# EAGLE board OPNpool r3 (EAGLE 9.6.2)
AUTHOR_NAME: Johan Vonk; REV: 0.1
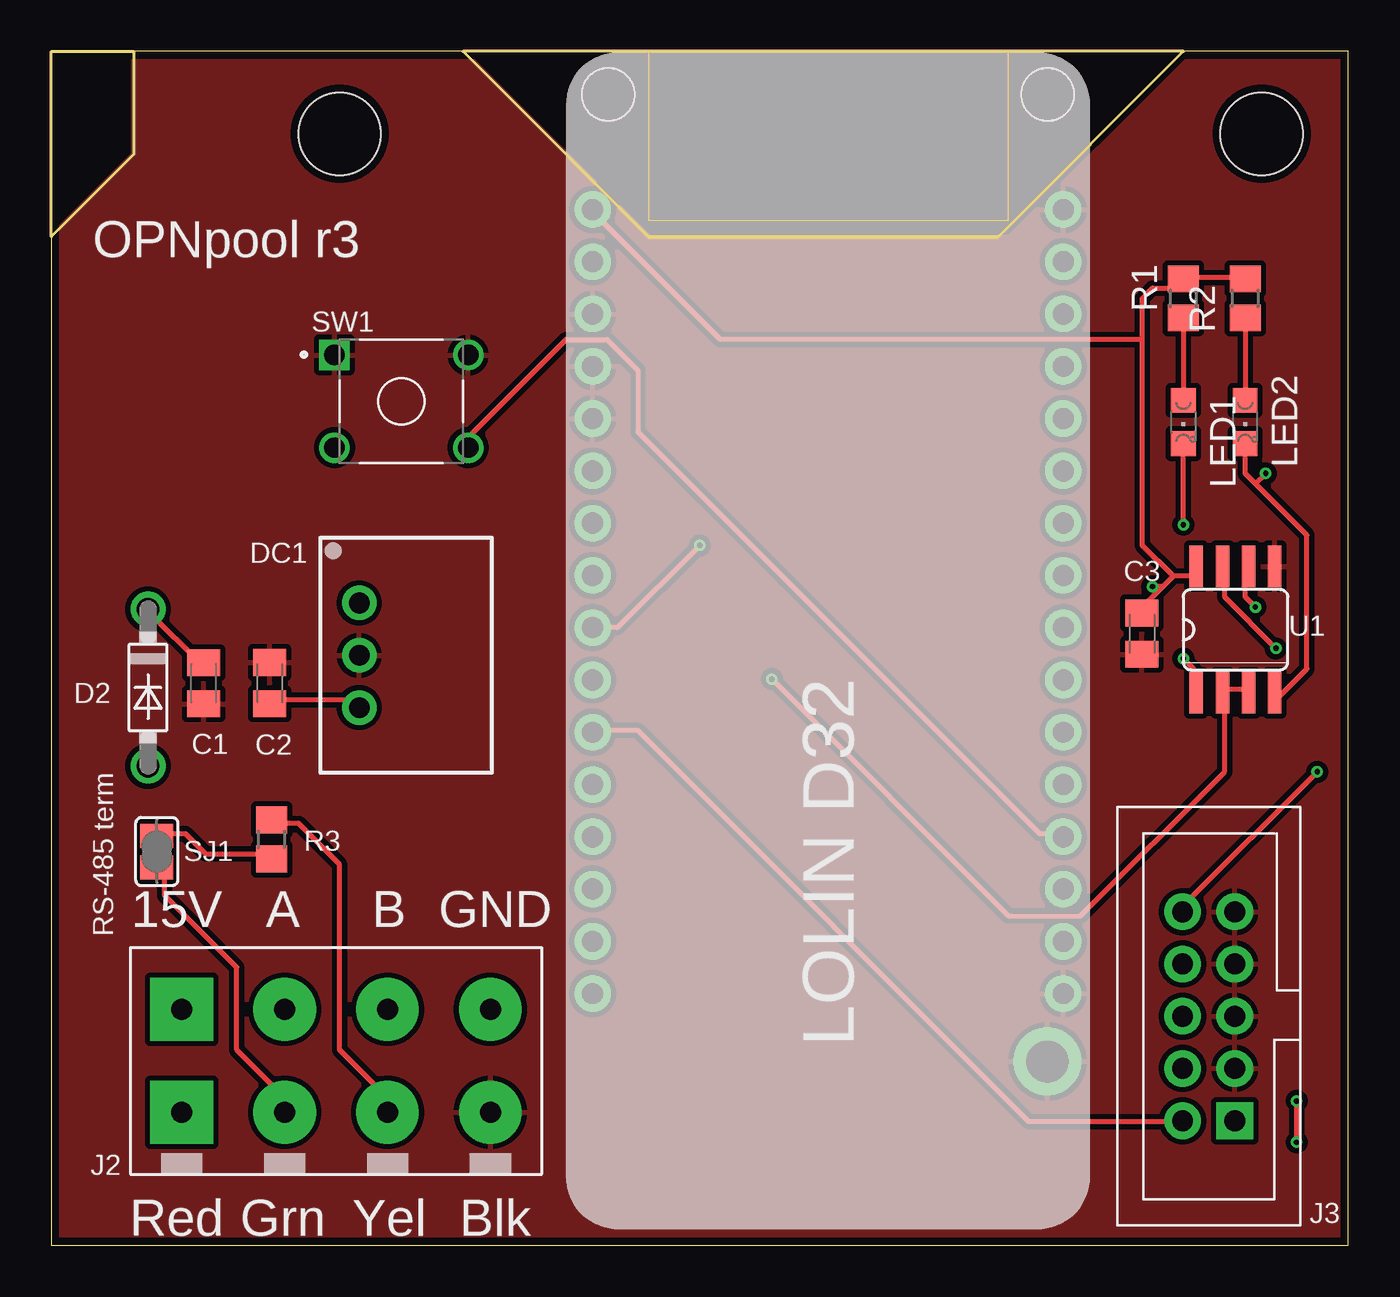
[diagram p0: board, top side]
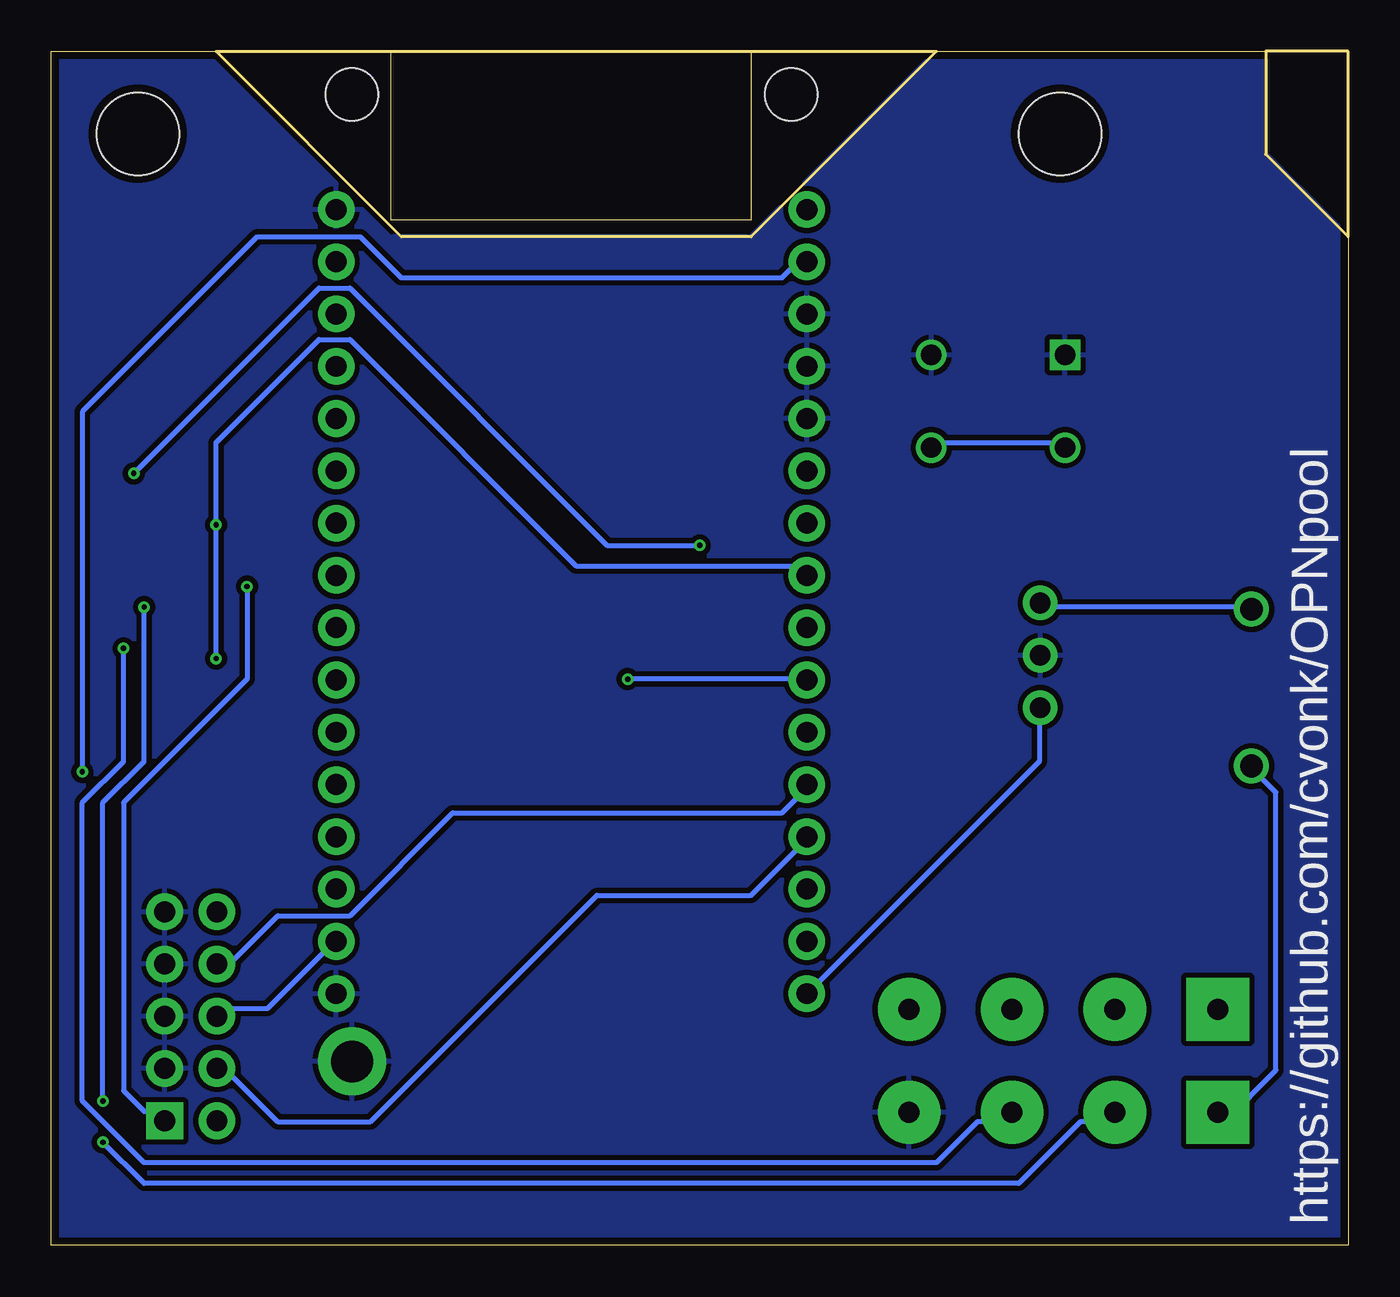
[diagram p1: board, bottom side, seen from below]

Size 63 x 58 mm. Coordinates in mm from the lower left corner, seen from the top.
Outline: 0,58 0,0 63,0 63,58 0,58
Copper layers (1*16): Top 0.035559375mm / dielectric 1.6mm / Bottom 0.035559375mm
Design rules "oshpark-2layer-auto-routing": minimum track width 10mil, minimum drill 10mil, track to track 10mil, track to pad 8mil, pad to pad 8mil, via to via 8mil, smd to smd 6mil, copper to edge 15mil, drill to drill 6mil, minimum pad ring 6mil, minimum via ring 6mil, stop-mask expansion 2.5mil, vias tented up to drill 0mil, thermal gap 10mil
Holes 4 mm at 14,54 58.8,54
tRestrict: area 29,50 to 47,58
bRestrict: area 29,50 to 47,58
Milling: area 29,49.8 to 46.5,58; 8 lines

## Footprints (pad centres in the part's own frame; a part is rotated, then mirrored left to right if it is on the bottom)
C0805K = smd 1.3 x 1.6: 1 -1,0; 2 1,0
DO41-7.6 = drill 1.1 pad 1.7: A 3.81,0; C -3.81,0
SIP3 = drill 1 pad 1.676: 1 -2.54,-2.54; 2 0,-2.54; 3 2.54,-2.54
SPTAF1/4-5,0-LL = drill 1.016 pad 3.048 square: 1 -7.713,-2.54; 1@1 -7.713,2.46 | drill 1.016 pad 3.048: 2 -2.713,-2.54; 2@1 -2.713,2.46; 3 2.287,-2.54; 3@1 2.287,2.46; 4 7.287,-2.54; 4@1 7.287,2.46
2X05_SHROUDED = drill 1.016 pad 1.778 square: 1 -5.08,-1.27 | drill 1.016 pad 1.778: 2 -5.08,1.27; 3 -2.54,-1.27; 4 -2.54,1.27; 5 0,-1.27; 6 0,1.27; 7 2.54,-1.27; 8 2.54,1.27; 9 5.08,-1.27; 10 5.08,1.27
CHIPLED_0805 = smd 1.2 x 1.2: A 0,-1.05; C 0,1.05
LOLIN-D32 = drill 1.016 pad 1.778: 0 -10.16,-10.16; 2 -12.7,-10.16; 3V3 20.32,12.7; 4 -7.62,-10.16; 5 0,-10.16; 12 -7.62,12.7; 13 -10.16,12.7; 14 -5.08,12.7; 15 -15.24,-10.16; 16 -5.08,-10.16; 17 -2.54,-10.16; 18 2.54,-10.16; 19 5.08,-10.16; 21 7.62,-10.16; 22 15.24,-10.16; 23 17.78,-10.16; 25 2.54,12.7; 26 0,12.7; 27 -2.54,12.7; 32 7.62,12.7; 33 5.08,12.7; 34 10.16,12.7; BAT -17.78,12.7; EN -12.7,12.7; GND -17.78,-10.16; GND@1 20.32,-10.16; RS 17.78,12.7; RX 10.16,-10.16; TX 12.7,-10.16; USB_5V -15.24,12.7; VN 12.7,12.7; VP 15.24,12.7 | drill 2.032 pad 3.302: GND@2 -21.082,-9.398 | hole 2.54: 25.908,11.938; 25.908,-9.398
R0805 = smd 1.3 x 1.5: 1 -0.95,0; 2 0.95,0
SJ = smd 1.168 x 1.6: 1 -0.762,0; 2 0.762,0
TE_1-1825910-4 = drill 0.99 square: 1 -3.25,2.25 | drill 0.99: 2 3.25,2.25; 3 -3.25,-2.25; 4 3.25,-2.25
SO08 = smd 0.66 x 2.032: 1 -1.905,-3.073; 2 -0.635,-3.073; 3 0.635,-3.073; 4 1.905,-3.073; 5 1.905,3.073; 6 0.635,3.073; 7 -0.635,3.073; 8 -1.905,3.073

## Placement (x,y rotation side)
C1  10uF mlcc 25V  [C0805K]  7.39,27.3 270 top
C2  10uF mlcc  [C0805K]  10.61,27.31 90 top
C3  0.1uF cer.  [C0805K]  52.99,29.71 270 top
D2  1N5818  [DO41-7.6]  4.69,27.09 270 top
DC1  R-78E5.0-0.5  [SIP3]  17.5,28.66 270 top
J2  RS485-TERM-SPTAF  [SPTAF1/4-5,0-LL]  14.04,8.99 0 top
J3  ESP-JTAG-2X05  [2X05_SHROUDED]  56.23,11.12 90 top
LED1  RX  [CHIPLED_0805]  55,40 180 top
LED2  TX  [CHIPLED_0805]  58,40 180 top
PCB1  LOLIN-D32  [LOLIN-D32]  39,30 90 top
R1  68Ω  [R0805]  55,46 90 top
R2  68Ω  [R0805]  58,46 90 top
R3  120Ω  [R0805]  10.69,19.71 270 top
SJ1  OPEN  [SJ]  5.12,19.12 270 top
SW1  Factory (5 sec)  [TE_1-1825910-4]  17,41 0 top
U1  MAX3485CSA+  [SO08]  57.53,29.91 0 top

## Library data of the parts
C1 C2 = rcl; MANF: Murata Electronics; MANF#: GJ821BR61E106KE11L; MOUSER#: 81-GJ821BR61E106KE1L; SPICEPREFIX: C
C3 = rcl; MANF: KEMET; MANF#: C0805C104K1RECAUTO; MOUSER#: 80-C0805C104K1REAUTO; SPICEPREFIX: C
D2 = Coert Vonk; MANF: Rectron; MANF#: 1N5818-T; MOUSER#: 583-1N5818-T
DC1 = Coert Vonk; MANF: RECOM Power; MANF#: R-78E5.0-0.5; MOUSER#: 919-R-78E5.0-0.5
J2 = Coert Vonk; MANF: Phoenix Contact; MANF#: 1864451; MOUSER#: 651-1864451
J3 = Coert Vonk; DIGIKEY#: WM3478-ND; MANF: Molex; MANF#: 70246-1004; MOUSER#: 538-70246-1004
LED1 LED2 = OPNpool
PCB1 = Coert-Vonk
R1-R3 = rcl; MANF: Bourns; MANF#: CRM0805-JW-1R5ELF; MOUSER#: 652-CRM0805JW1R5ELF; SPICEPREFIX: R
SJ1 = jumper
SW1 = 1-1825910-4; COMMENT: 1-1825910-4; DESCRIPTION: Switch Tactile OFF (ON) SPST Round Button PC Pins 0.05A 24VDC 100000Cycles 1.56N Thru-Hole; DIGI-KEY_PART_NUMBER: 450-1653-ND; MF: TE Connectivity; MP: 1-1825910-4; PACKAGE: None; PURCHASE-URL: https://pricing.snapeda.com/search/part/1-1825910-4/?ref=eda
U1 = Coert Vonk; MANF: Maxim Integrated; MANF#: MAX3485CSA+; MF: MAXIM; MOUSER#: 700-MAX3485CSA; MPN: MAX481CSA; OC_FARNELL: unknown; OC_NEWARK: 90C3817

## Nets
3V3: C3.1 J3.1 PCB1.3V3 R1.2 R2.2 U1.8
15V: D2.A J2.1
A: J2.2 SJ1.2 U1.6
B: J2.3 R3.1 U1.7
GND: C1.2 C2.2 C3.2 DC1.2 J2.4 J3.3 J3.5 J3.7 J3.9 PCB1.34 PCB1.GND PCB1.GND@1 PCB1.GND@2 PCB1.VN PCB1.VP SW1.1 SW1.2 U1.5
JTAG_!RST: J3.10 PCB1.RS
JTAG_CK: J3.4 PCB1.13
JTAG_DI: J3.8 PCB1.12
JTAG_DO: J3.6 PCB1.15
JTAG_MS: J3.2 PCB1.14
N$1: LED1.A R1.1
N$2: LED2.A R2.1
N$3: PCB1.0 SW1.3 SW1.4
N$5: R3.2 SJ1.1
RTS: PCB1.27 U1.2 U1.3
RX2: LED1.C PCB1.25 U1.1
TX: LED2.C PCB1.26 U1.4
VIN: C1.1 D2.C DC1.1
VOUT: C2.1 DC1.3 PCB1.BAT

## Tracks (layer width: path | path; a pad name or v marks a point on that pad's centre or on a via)
3V3  (via drill 0.25)
  Top 0.254: R2.2 58,47 55,47 R1.2 55,46.5 53.5,46.5 53,46 53,44 | 54.5,32.5 54,32 | 54,32 53,31 C3.1 | 54.5,32.5 55.5,32.5 U1.8 | 53,44 53,34 54.5,32.5 | 54,32 v53.5,32 | 53,44 32.5,44 26.5,50 PCB1.3V3
  Bottom 0.254: v53.5,32 53.5,27.5 59.5,21.5 59.5,7.5 58.5,6.5 57.5,6.5 J3.1
15V
  Bottom 0.254: D2.A 4.5,23 3.5,22 3.5,8.5 6,6 J2.1
A  (via drill 0.25)
  Top 0.254: SJ1.2 5.5,18 5.5,17 9,13.5 9,9.5 11,7.5 11,6.5 J2.2 | v58.5,31 58,31.5 58,32.5 U1.6 | v60.5,5 v60.5,7
  Bottom 0.254: v58.5,31 58.5,23.5 60.5,21.5 v60.5,7 | v60.5,5 58.5,3 16,3 13,6 11.5,6 J2.2
B  (via drill 0.25)
  Top 0.254: R3.1 11,20.5 12,20.5 14,18.5 14,9.5 16,7.5 16,6.5 J2.3 | v59.5,29 57,31.5 57,32.5 U1.7
  Bottom 0.254: v59.5,29 59.5,23.5 61.5,21.5 61.5,7 58.5,4 20,4 18,6 16.5,6 J2.3
GND
  pour Top: 0,0 0,49 4,53 4,58 20,58 29.1,48.9 29.2,49 46.4,49 46.5,48.9 55.4,57.8 55.4,58 63,58 63,0
  pour Bottom: 0,0 0,49 4,53 4,58 20,58 29.1,48.9 29.2,49 46.4,49 46.5,48.9 55.4,57.8 55.4,58 63,58 63,0
  pour Top: 0,0 0,49 4,53 4,58 20,58 29.1,48.9 29.2,49 46.4,49 46.5,48.9 55.4,57.8 63.15,57.8 63.15,0
JTAG_!RST  (via drill 0.25)
  Top 0.254: v61.5,23 55,16.5 J3.10
  Bottom 0.254: v61.5,23 61.5,40.5 53,49 48,49 46,47 27.5,47 26.5,48 PCB1.RS
JTAG_CK
  Bottom 0.254: PCB1.13 26.5,19.5 29,17 36.5,17 47.5,6 52,6 54.5,8.5 J3.4
JTAG_DI
  Bottom 0.254: PCB1.12 26.5,22 27.5,21 43.5,21 48.5,16 52,16 54.5,13.5 J3.8
JTAG_DO
  Bottom 0.254: PCB1.15 49.5,14.5 52.5,11.5 54.5,11.5 J3.6
JTAG_MS
  Top 0.254: PCB1.14 26.5,25 28.5,25 47.5,6 54.5,6 J3.2
N$1
  Top 0.254: R1.1 LED1.A
N$2
  Top 0.254: R2.1 LED2.A
N$3
  Top 0.254: PCB1.0 49,20 48,20 28.5,39.5 28.5,42.5 27,44 25,44 20,39 SW1.4
  Bottom 0.254: SW1.3 14,39 20,39 SW1.4
N$5
  Top 0.254: R3.2 10.5,19 7.5,19 6.5,20 5.5,20 SJ1.1
RTS  (via drill 0.25)
  Top 0.254: U1.3 58,27 57,27 U1.2 57,26.5 57,23 50,16 46.5,16 v35,27.5
  Bottom 0.254: v35,27.5 26.5,27.5 PCB1.27
RX2  (via drill 0.25)
  Top 0.254: v55,35 LED1.C | v55,28.5 55.5,28 55.5,27 U1.1
  Bottom 0.254: v55,28.5 v55,35 55,39 50,44 48.5,44 37.5,33 26.5,33 PCB1.25
TX  (via drill 0.25)
  Top 0.254: LED2.C 58,37.5 58.5,37 | 58.5,37 61,34.5 61,28 59.5,26.5 U1.4 | PCB1.26 27.5,30 v31.5,34 | 58.5,37 v59,37.5
  Bottom 0.254: v31.5,34 36,34 48.5,46.5 50,46.5 v59,37.5
VIN
  Top 0.254: C1.1 7,28.5 5,30.5 D2.C
  Bottom 0.254: DC1.1 14.5,31 5,31 D2.C
VOUT
  Top 0.254: C2.1 11,26.5 14.5,26.5 DC1.3
  Bottom 0.254: PCB1.BAT 26,12.5 15,23.5 15,26 DC1.3

## Text on the board
tNames: OPNpool r3 | RS-485 term
bNames: https://github.com/cvonk/OPNpool